# Altium PCB Switcher.PcbDoc (part 2 of 3)
Units mm, origin at the board's own origin, x right, y up, seen from the top; angles counter-clockwise.
Board outline 152.4 x 101.6 mm, 2 copper layers (Top Layer, Bottom Layer); 59 components, 74 nets, 310 pads, 234 vias.
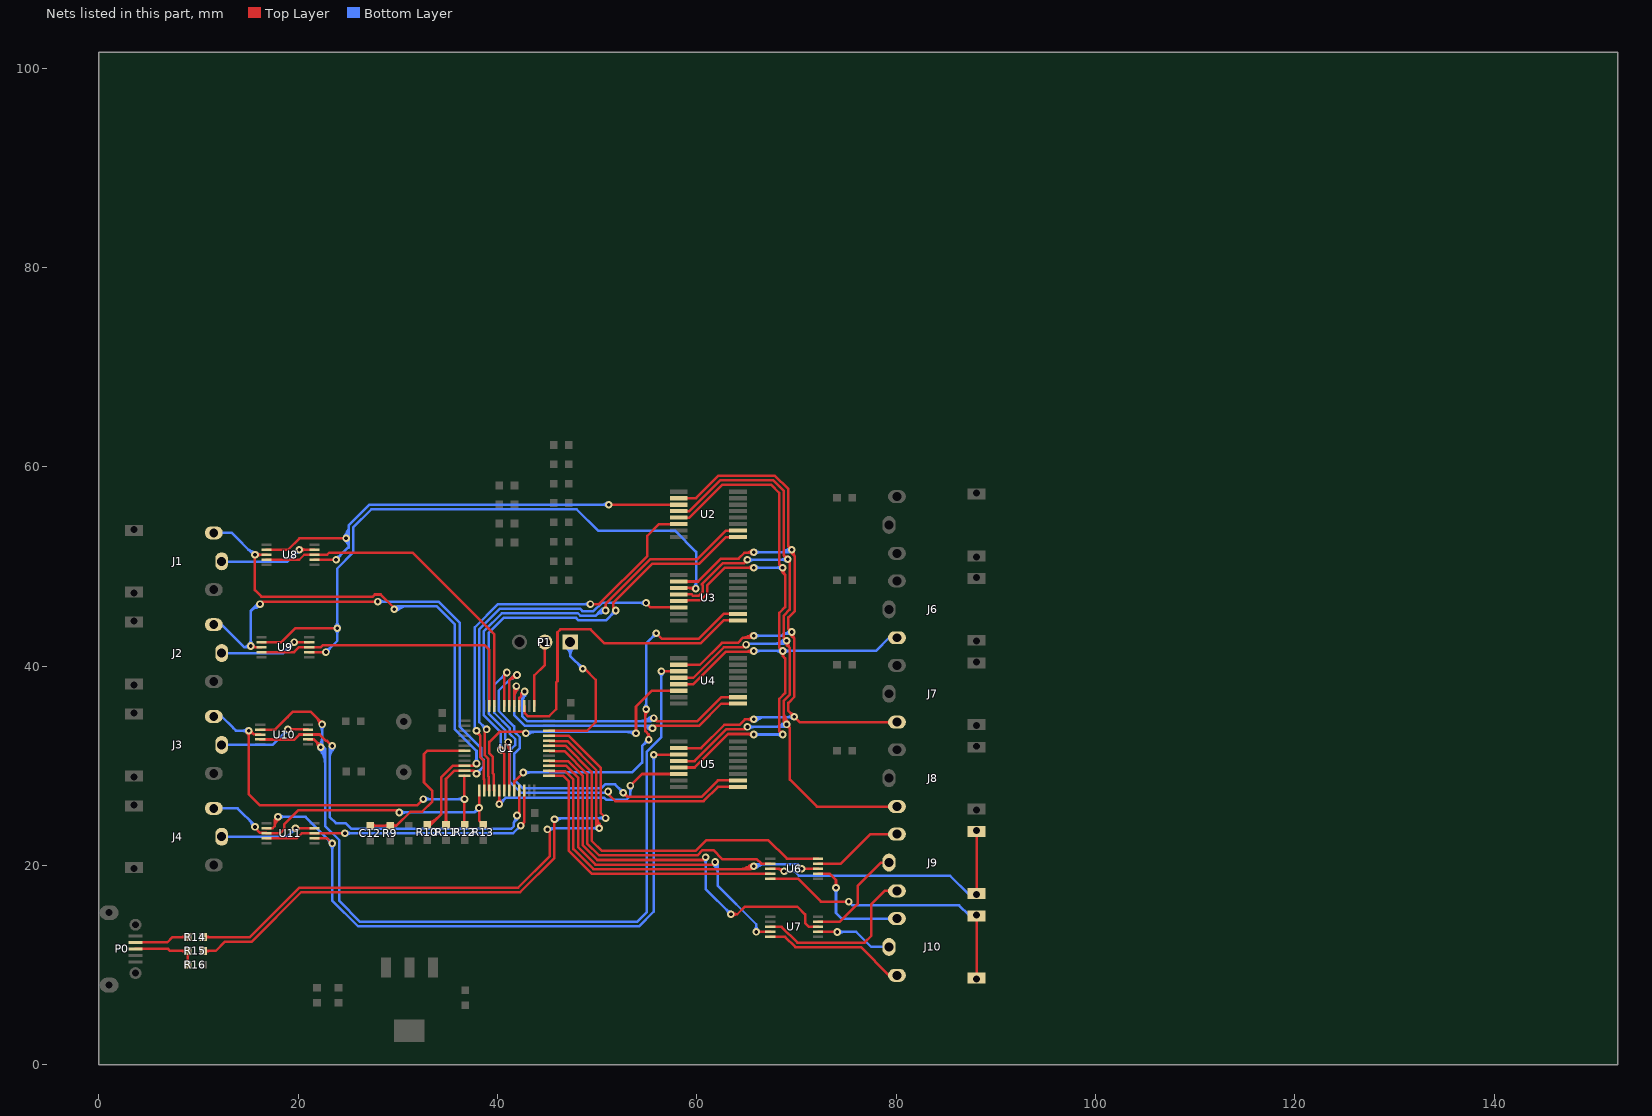
[diagram p2: the nets of this part, all layers, seen from the top]

## Via types
v1: diameter 0.762, hole 0.381, Top Layer to Bottom Layer, 152 vias
v2: diameter 0.76, hole 0.38, Top Layer to Bottom Layer, 80 vias
v3: diameter 0.72, hole 0.38, Top Layer to Bottom Layer, 2 vias

## Nets (pads, with @x,y where several pads share a name; then routed paths per layer and width w, separated by ;. In a path a pad name is that pad's centre, name@x,y a point inside that pad or via, vN(x,y) a via of type N, cw(c..) or ccw(c..) an arc to the next point about the centre after c; other vN are vias at no path point) (continued)
NetJ6_3: J6.3 U2.5 U3.5 U4.5 U5.5 | length 114.1
  Top Layer w0.254: U5.5@58.179,29.836 59.759,29.836 63.121,33.198 65.646,33.198 v1(65.697,33.147) ; U4.5@58.179,38.192 59.643,38.192 62.878,41.427 65.595,41.427 v1(65.697,41.529) ; U3.5@58.179,46.549 58.25,46.62 60.372,46.62 61.057,47.304 61.057,48.137 62.805,49.886 v1(65.701,49.886) ; U2.5@58.179,54.906 59.247,54.906 62.559,58.217 67.424,58.217 68.26,57.381 68.26,50.218 ; v1(68.618,33.147) 68.26,33.505 ; 65.087,49.886 cw(c65.087,49.272) 65.521,49.706 ccw(c65.087,49.272) 65.087,49.886 ; 65.087,49.886 ccw(c65.087,50.499) 65.521,50.065 cw(c65.087,50.499) 65.087,49.886 ; 68.26,33.505 cw(c67.994,33.238) 68.367,33.184 ccw(c67.994,33.238) 68.26,33.505 ; 68.26,33.505 ccw(c68.527,33.771) 68.581,33.398 cw(c68.527,33.771) 68.26,33.505 ; 68.26,33.505 68.26,36.726 68.846,37.312 68.846,40.783 68.618,41.011 ; 68.26,41.887 cw(c67.994,41.62) 68.367,41.566 ccw(c67.994,41.62) 68.26,41.887 ; 68.26,41.887 ccw(c68.527,42.153) 68.581,41.78 cw(c68.527,42.153) 68.26,41.887 ; 68.26,41.887 68.26,45.35 68.846,45.936 68.846,49.165 ; 68.26,41.887 v1(68.618,41.529) 68.618,41.011 ; 68.26,50.218 cw(c68.043,50) 68.344,49.938 ccw(c68.043,50) 68.26,50.218 ; 68.26,50.218 ccw(c68.478,50.435) 68.541,50.134 cw(c68.478,50.435) 68.26,50.218 ; 68.26,50.218 v1(68.593,49.886) ; 68.593,49.418 cw(c68.896,49.418) 68.731,49.673 ccw(c68.896,49.418) 68.593,49.418 ; 68.593,49.418 ccw(c68.289,49.418) 68.454,49.673 cw(c68.289,49.418) 68.593,49.418 ; 68.593,49.418 v1(68.593,49.886) ; 68.593,49.418 68.846,49.165 ; v1(68.593,49.886) ccw(c68.914,49.655) 68.634,49.376 cw(c68.914,49.655) v1(68.593,49.886) ; 68.618,41.011 cw(c69.02,41.011) 68.774,41.328 ccw(c69.02,41.011) 68.618,41.011 ; 68.618,41.011 ccw(c68.216,41.011) 68.462,41.328 cw(c68.216,41.011) 68.618,41.011 ; 68.846,49.165 cw(c69.16,49.479) 68.799,49.738 ccw(c69.16,49.479) 68.846,49.165 ; U3.5@58.917,46.49 cw(c59.23,46.177) 59.23,46.62 ccw(c59.23,46.177) U3.5@58.917,46.49 ; 64.839,41.427 ccw(c64.839,42.387) 65.517,41.709 cw(c64.839,42.387) 64.839,41.427 ; 64.961,33.198 cw(c64.961,32.411) 65.517,32.967 ccw(c64.961,32.411) 64.961,33.198 ; 65.206,33.198 ccw(c65.206,33.638) 65.517,33.327 cw(c65.206,33.638) 65.206,33.198 ; 65.329,41.427 cw(c65.329,41.161) 65.517,41.349 ccw(c65.329,41.161) 65.329,41.427
  Bottom Layer w0.254: v1(65.697,33.147) v1(68.618,33.147) ; v1(65.697,41.529) v1(68.618,41.529) 77.956,41.529 79.281,42.855 J6.3@80.069,42.855 ; v1(65.701,49.886) v1(68.593,49.886) ; 66.31,33.147 cw(c66.31,33.76) 65.877,33.327 ccw(c66.31,33.76) 66.31,33.147 ; 66.31,33.147 ccw(c66.31,32.534) 65.877,32.967 cw(c66.31,32.534) 66.31,33.147 ; 66.31,41.529 cw(c66.31,42.142) 65.877,41.709 ccw(c66.31,42.142) 66.31,41.529 ; 66.31,41.529 ccw(c66.31,40.916) 65.877,41.349 cw(c66.31,40.916) 66.31,41.529 ; 66.314,49.886 cw(c66.314,50.499) 65.88,50.065 ccw(c66.314,50.499) 66.314,49.886 ; 66.314,49.886 ccw(c66.314,49.272) 65.88,49.706 cw(c66.314,49.272) 66.314,49.886 ; 67.979,49.886 cw(c67.979,49.272) 68.413,49.706 ccw(c67.979,49.272) 67.979,49.886 ; 67.979,49.886 ccw(c67.979,50.499) 68.413,50.065 cw(c67.979,50.499) 67.979,49.886 ; 68.005,33.147 cw(c68.005,32.534) 68.438,32.967 ccw(c68.005,32.534) 68.005,33.147 ; 68.005,33.147 ccw(c68.005,33.76) 68.438,33.327 cw(c68.005,33.76) 68.005,33.147 ; 68.005,41.529 cw(c68.005,40.916) 68.438,41.349 ccw(c68.005,40.916) 68.005,41.529 ; 68.005,41.529 ccw(c68.005,42.142) 68.438,41.709 cw(c68.005,42.142) 68.005,41.529 ; 69.231,41.529 cw(c69.231,42.142) 68.798,41.709 ccw(c69.231,42.142) 69.231,41.529 ; 69.231,41.529 ccw(c69.231,40.916) 68.798,41.349 cw(c69.231,40.916) 69.231,41.529
NetJ7_3: J7.3 U2.2 U3.2 U4.2 U5.2 | length 118.7
  Top Layer w0.254: U5.2@58.179,31.786 60.416,31.786 62.742,34.112 64.249,34.112 64.808,34.671 v1(65.697,34.671) ; U4.2@58.179,40.142 60.3,40.142 62.499,42.341 64.107,42.341 64.64,42.875 65.519,42.875 v1(65.697,43.053) ; U3.2@58.179,48.499 60.126,48.499 62.426,50.8 64.183,50.8 64.767,51.384 65.646,51.384 v1(65.697,51.435) ; U2.2@58.179,56.856 59.905,56.856 62.18,59.131 67.803,59.131 69.174,57.759 69.174,52.022 ; 65.093,42.987 cw(c65.245,42.723) v1@65.492,42.903 ; 69.421,35.245 ccw(c69.85,35.36) v1(69.761,34.925) ; 69.441,35.265 cw(c69.326,34.836) v1(69.761,34.925) ; J7.3@79.281,34.386 70.3,34.386 v1(69.761,34.925) ; 65.084,34.671 cw(c65.084,34.058) 65.517,34.491 ccw(c65.084,34.058) 65.084,34.671 ; 65.084,34.671 ccw(c65.084,35.284) 65.517,34.851 cw(c65.084,35.284) 65.084,34.671 ; v1(65.697,43.053) cw(c65.267,43.483) 65.267,42.875 ccw(c65.267,43.483) v1(65.697,43.053) ; 69.174,43.767 cw(c68.956,43.548) 69.258,43.486 ccw(c68.956,43.548) 69.174,43.767 ; 69.174,43.767 ccw(c69.393,43.985) 69.455,43.683 cw(c69.393,43.985) 69.174,43.767 ; 69.174,43.767 69.174,44.896 69.83,45.551 69.83,51.019 ; 69.174,43.767 v1(69.507,43.434) ; 69.174,52.022 cw(c68.956,51.803) 69.258,51.741 ccw(c68.956,51.803) 69.174,52.022 ; 69.174,52.022 ccw(c69.393,52.24) 69.455,51.938 cw(c69.393,52.24) 69.174,52.022 ; 69.174,52.022 v1(69.507,51.689) ; 69.327,35.359 cw(c68.894,34.925) 69.507,34.925 ccw(c68.894,34.925) 69.327,35.359 ; 69.327,35.359 ccw(c69.761,35.792) 69.761,35.179 cw(c69.761,35.792) 69.327,35.359 ; 69.507,43.043 cw(c69.682,43.043) 69.611,43.202 ccw(c69.682,43.043) 69.507,43.043 ; 69.507,43.043 ccw(c69.332,43.043) 69.403,43.202 cw(c69.332,43.043) 69.507,43.043 ; 69.507,43.043 v1(69.507,43.434) ; 69.507,43.043 69.786,42.764 ; v1(69.507,43.434) ccw(c69.813,43.245) 69.559,42.991 cw(c69.813,43.245) v1(69.507,43.434) ; v1(69.507,51.689) ccw(c69.836,51.529) 69.577,51.271 cw(c69.836,51.529) v1(69.507,51.689) ; v1(69.507,51.689) 69.507,51.341 69.83,51.019 ; v1(69.761,34.925) 69.174,35.512 69.174,36.322 69.786,36.934 69.786,42.764 ; 69.786,42.764 cw(c70.094,43.072) 69.723,43.301 ccw(c70.094,43.072) 69.786,42.764 ; 69.83,51.019 cw(c70.176,51.365) 69.736,51.578 ccw(c70.176,51.365) 69.83,51.019 ; 64.654,42.875 ccw(c64.654,44.096) 65.517,43.233 cw(c64.654,44.096) 64.654,42.875 ; 64.961,51.384 ccw(c64.961,52.171) 65.517,51.615 cw(c64.961,52.171) 64.961,51.384 ; 65.207,51.384 cw(c65.207,50.945) 65.517,51.255 ccw(c65.207,50.945) 65.207,51.384
  Bottom Layer w0.254: v1(65.697,43.053) 68.501,43.053 68.704,43.256 ; v1(65.697,51.435) 69.253,51.435 v1(69.507,51.689) ; v1@65.89,34.836 ccw(c66.161,35.067) 66.34,34.759 ; 66.075,34.606 cw(c65.925,34.866) v1(65.697,34.671) ; 68.786,51.556 cw(c69.023,51.147) v1@69.338,51.5 ; 69.091,51.732 cw(c69.269,51.423) v1(69.507,51.689) ; v1@69.253,51.693 cw(c68.983,51.698) 69.118,51.465 cw(c69.253,51.231) v1@69.384,51.467 ; v1(69.507,43.434) 69.329,43.256 68.704,43.256 ; v1(69.761,34.925) 69.71,34.874 65.9,34.874 v1(65.697,34.671) ; v1(65.697,34.671) cw(c66.187,34.181) 66.187,34.874 ccw(c66.187,34.181) v1(65.697,34.671) ; 66.31,43.053 cw(c66.31,43.666) 65.877,43.233 ccw(c66.31,43.666) 66.31,43.053 ; 66.31,43.053 ccw(c66.31,42.44) 65.877,42.873 cw(c66.31,42.44) 66.31,43.053 ; 66.31,51.435 cw(c66.31,52.048) 65.877,51.615 ccw(c66.31,52.048) 66.31,51.435 ; 66.31,51.435 ccw(c66.31,50.822) 65.877,51.255 cw(c66.31,50.822) 66.31,51.435 ; 68.705,43.256 ccw(c68.705,43.963) 69.295,43.574 cw(c68.705,43.963) 68.705,43.256 ; v1(69.507,51.689) cw(c68.894,52.302) 68.894,51.435 ccw(c68.894,52.302) v1(69.507,51.689) ; v1@65.877,34.491 cw(c66.8,33.568) 66.8,34.874 ccw(c66.8,33.568) v1@65.877,34.491 ; 68.281,51.435 ccw(c68.281,52.915) 69.327,51.869 cw(c68.281,52.915) 68.281,51.435 ; 69.025,34.874 ccw(c69.025,35.661) 69.581,35.105 cw(c69.025,35.661) 69.025,34.874 ; 69.271,34.874 cw(c69.271,34.435) 69.581,34.745 ccw(c69.271,34.435) 69.271,34.874
NetJ8_3: J8.3 U2.4 U3.4 U4.4 U5.4 | length 125.9
  Top Layer w0.254: U5.4@58.179,30.486 59.762,30.486 62.931,33.655 64.808,33.655 v1(65.062,33.909) ; U4.4@58.179,38.842 59.646,38.842 62.688,41.884 64.655,41.884 ; U3.4@58.179,47.199 59.472,47.199 59.594,47.077 60.183,47.077 60.6,47.494 60.6,48.083 60.478,48.204 62.616,50.343 64.732,50.343 ; U2.4@58.179,55.556 59.251,55.556 62.37,58.674 67.613,58.674 68.717,57.57 68.717,51.126 ; v1(64.935,42.164) 64.655,41.884 ; v1(65.062,50.673) 64.732,50.343 ; 68.741,51.054 cw(c68.636,50.552) v1(69.119,50.724) ; v1@68.767,34.267 ccw(c68.438,34.414) 68.75,34.594 ccw(c69.062,34.774) v1@69.025,34.416 ; 68.789,51.102 ccw(c69.291,51.207) v1(69.119,50.724) ; v1@68.799,34.32 ccw(c68.372,34.654) 68.842,34.926 ; 69.03,34.6 cw(c68.691,34.404) v1(68.999,34.163) ; 69.283,33.833 cw(c69.382,34.206) v1(68.999,34.163) ; 69.303,49.59 69.303,45.671 68.717,45.085 68.717,42.827 ; 69.304,49.59 69.304,50.539 v1(69.119,50.724) ; J8.3@79.281,25.918 72.037,25.918 69.329,28.626 69.329,33.772 ; 64.655,41.884 cw(c64.783,41.757) 64.846,41.926 ccw(c64.783,41.757) 64.655,41.884 ; 64.655,41.884 ccw(c64.528,42.012) 64.697,42.075 cw(c64.528,42.012) 64.655,41.884 ; 64.732,50.343 cw(c64.946,50.129) 65.009,50.425 ccw(c64.946,50.129) 64.732,50.343 ; 64.732,50.343 ccw(c64.518,50.557) 64.814,50.62 cw(c64.518,50.557) 64.732,50.343 ; 68.717,34.445 cw(c68.586,34.314) 68.76,34.25 ccw(c68.586,34.314) 68.717,34.445 ; 68.717,34.445 ccw(c68.848,34.576) 68.912,34.402 cw(c68.848,34.576) 68.717,34.445 ; 68.717,34.445 68.717,36.537 69.329,37.149 69.329,41.824 ; 68.717,34.445 v1(68.999,34.163) ; 68.717,42.827 cw(c68.586,42.696) 68.76,42.632 ccw(c68.586,42.696) 68.717,42.827 ; 68.717,42.827 ccw(c68.848,42.958) 68.912,42.784 cw(c68.848,42.958) 68.717,42.827 ; 68.717,42.827 v1(68.999,42.545) ; 68.717,51.126 cw(c68.358,50.767) 68.865,50.738 ccw(c68.358,50.767) 68.717,51.126 ; 68.717,51.126 ccw(c69.076,51.485) 69.105,50.978 cw(c69.076,51.485) 68.717,51.126 ; 68.717,51.126 v1(69.119,50.724) ; v1(68.999,34.163) cw(c69.679,34.843) 68.717,34.843 ccw(c69.679,34.843) v1(68.999,34.163) ; v1(68.999,34.163) 68.999,34.102 69.329,33.772 ; 68.999,42.154 cw(c69.174,42.154) 69.103,42.313 ccw(c69.174,42.154) 68.999,42.154 ; 68.999,42.154 ccw(c68.824,42.154) 68.895,42.313 cw(c68.824,42.154) 68.999,42.154 ; 68.999,42.154 v1(68.999,42.545) ; 68.999,42.154 69.329,41.824 ; v1(68.999,42.545) ccw(c69.367,42.365) 69.077,42.075 cw(c69.367,42.365) v1(68.999,42.545) ; 69.329,33.772 cw(c69.564,34.006) 69.244,34.095 ccw(c69.564,34.006) 69.329,33.772 ; 69.329,41.824 cw(c69.705,42.2) 69.227,42.433 ccw(c69.705,42.2) 69.329,41.824 ; 68.717,35.456 ccw(c70.292,35.456) 69.179,34.343 cw(c70.292,35.456) 68.717,35.456 ; v1@68.999,33.909 cw(c68.999,33.444) 69.328,33.773 ccw(c68.999,33.444) v1@68.999,33.909
  Bottom Layer w0.254: v1(64.935,42.164) 65.011,42.24 68.694,42.24 v1(68.999,42.545) ; v1(65.062,33.909) 68.745,33.909 v1(68.999,34.163) ; v1(65.062,50.673) 69.068,50.673 v1(69.119,50.724) ; 68.2,42.367 cw(c68.503,41.843) v1@68.853,42.337 ; 68.278,34.03 cw(c68.515,33.621) v1@68.83,33.974 ; 68.544,42.566 cw(c68.755,42.2) v1(68.999,42.545) ; 68.583,34.206 cw(c68.761,33.897) v1(68.999,34.163) ; v1@68.745,34.167 cw(c68.475,34.172) 68.61,33.939 cw(c68.745,33.705) v1@68.876,33.941 ; v1@68.749,42.587 cw(c68.31,42.661) 68.532,42.275 cw(c68.755,41.89) v1@68.91,42.307 ; 65.675,33.909 cw(c65.675,34.522) 65.242,34.089 ccw(c65.675,34.522) 65.675,33.909 ; 65.675,33.909 ccw(c65.675,33.296) 65.242,33.729 cw(c65.675,33.296) 65.675,33.909 ; 65.675,50.673 cw(c65.675,51.286) 65.242,50.853 ccw(c65.675,51.286) 65.675,50.673 ; 65.675,50.673 ccw(c65.675,50.06) 65.242,50.493 cw(c65.675,50.06) 65.675,50.673 ; v1(68.999,34.163) cw(c68.386,34.776) 68.386,33.909 ccw(c68.386,34.776) v1(68.999,34.163) ; v1(68.999,42.545) cw(c68.263,43.281) 68.263,42.24 ccw(c68.263,43.281) v1(68.999,42.545) ; 67.649,42.24 ccw(c67.649,43.895) 68.819,42.725 cw(c67.649,43.895) 67.649,42.24 ; 67.773,33.909 ccw(c67.773,35.389) 68.819,34.343 cw(c67.773,35.389) 67.773,33.909 ; 68.383,50.673 ccw(c68.383,51.46) 68.939,50.904 cw(c68.383,51.46) 68.383,50.673 ; 68.629,50.673 cw(c68.629,50.234) 68.939,50.544 ccw(c68.629,50.234) 68.629,50.673
NetP0_2: P0.2 R14.1 | length 7.4
  Top Layer w0.254: P0.2@3.67,12.281 6.858,12.281 7.404,12.827 R14.1@8.928,12.827 ; 8.315,12.827 cw(c8.315,12.214) 8.748,12.647 ccw(c8.315,12.214) 8.315,12.827 ; 8.315,12.827 ccw(c8.315,13.44) 8.748,13.007 cw(c8.315,13.44) 8.315,12.827
NetP0_3: P0.3 R15.1 R16.1 | length 12.5
  Top Layer w0.254: P0.3@3.67,11.633 6.947,11.633 7.15,11.43 R15.1@8.928,11.43 R16.1@8.928,10.033 ; 8.315,11.43 cw(c8.315,10.817) R15.1@8.748,11.25 ; 8.315,11.43 ccw(c8.315,12.043) 8.748,11.61 cw(c8.315,12.043) 8.315,11.43 ; 8.315,11.43 cw(c8.315,10.817) R15.1@8.748,11.25 ; R15.1@8.748,11.25 cw(c8.315,10.817) 8.928,10.817 ; R15.1@8.748,11.25 cw(c8.315,10.817) 8.928,10.817 ; 8.928,10.646 cw(c8.315,10.646) 8.748,10.213 ccw(c8.315,10.646) 8.928,10.646 ; 8.928,10.646 ccw(c9.541,10.646) 9.108,10.213 cw(c9.541,10.646) 8.928,10.646 ; 8.928,10.817 cw(c9.541,10.817) 9.108,11.25 ccw(c9.541,10.817) 8.928,10.817
NetR14_2: R14.2 U1.32 | length 70.8
  Top Layer w0.254: R14.2@10.452,12.827 15.151,12.827 20.104,17.78 42.075,17.78 45.25,20.955 45.25,23.368 v1(44.996,23.622) ; U1.32@45.177,32.525 45.22,32.482 46.998,32.482 49.898,29.583 49.898,24.054 ; v1@49.965,23.838 ccw(c49.548,23.993) 49.933,24.216 ccw(c50.319,24.438) v1@50.245,23.999 ; v1@49.995,23.895 ccw(c49.501,24.245) 50.025,24.548 ; 50.224,24.204 cw(c49.858,23.993) v1(50.203,23.749) ; 11.065,12.827 cw(c11.065,13.44) 10.632,13.007 ccw(c11.065,13.44) 11.065,12.827 ; 11.065,12.827 ccw(c11.065,12.214) 10.632,12.647 cw(c11.065,12.214) 11.065,12.827 ; 49.898,24.054 cw(c49.729,23.885) 49.959,23.819 ccw(c49.729,23.885) 49.898,24.054 ; 49.898,24.054 ccw(c50.067,24.223) 50.133,23.993 cw(c50.067,24.223) 49.898,24.054 ; 49.898,24.054 v1(50.203,23.749) ; v1(50.203,23.749) cw(c50.939,24.485) 49.898,24.485 ccw(c50.939,24.485) v1(50.203,23.749) ; 49.898,25.099 ccw(c51.553,25.099) 50.383,23.929 cw(c51.553,25.099) 49.898,25.099
  Bottom Layer w0.254: v1(44.996,23.622) 45.123,23.749 v1(50.203,23.749) ; 49.59,23.749 cw(c49.59,23.136) 50.023,23.569 ccw(c49.59,23.136) 49.59,23.749 ; 49.59,23.749 ccw(c49.59,24.362) 50.023,23.929 cw(c49.59,24.362) 49.59,23.749 ; v1@45.176,23.442 cw(c45.916,22.702) 45.916,23.749 ccw(c45.916,22.702) v1@45.176,23.442
NetR15_2: R15.2 U1.33 | length 65.4
  Top Layer w0.254: R15.2@10.452,11.43 11.722,11.43 12.662,12.37 15.34,12.37 20.293,17.323 42.264,17.323 45.707,20.766 v1(45.707,24.638) ; U1.33@45.177,33.025 47.102,33.025 50.355,29.772 50.355,25.248 v1(50.838,24.765) ; 11.065,11.43 cw(c11.065,12.043) 10.632,11.61 ccw(c11.065,12.043) 11.065,11.43 ; 11.065,11.43 ccw(c11.065,10.817) 10.632,11.25 cw(c11.065,10.817) 11.065,11.43
  Bottom Layer w0.254: v1(45.707,24.638) 45.834,24.765 v1(50.838,24.765) ; 50.225,24.765 cw(c50.225,24.152) 50.658,24.585 ccw(c50.225,24.152) 50.225,24.765 ; 50.225,24.765 ccw(c50.225,25.378) 50.658,24.945 cw(c50.225,25.378) 50.225,24.765 ; v1@45.887,24.458 cw(c46.627,23.718) 46.627,24.765 ccw(c46.627,23.718) v1@45.887,24.458
NRST: C12.2 R9.1 U1.7 | length 22.3
  Top Layer w0.254: C12.2@27.216,24.003 R9.1@29.248,24.003 29.855,24.003 ; U1.7@36.677,31.525 32.96,31.525 32.616,31.181 32.616,28.331 33.453,27.494 33.453,26.43 32.423,25.4 31.252,25.4 29.855,24.003 ; 27.829,24.003 cw(c27.829,24.616) 27.396,24.183 ccw(c27.829,24.616) 27.829,24.003 ; 27.829,24.003 ccw(c27.829,23.39) 27.396,23.823 cw(c27.829,23.39) 27.829,24.003 ; 28.635,24.003 cw(c28.635,23.39) 29.068,23.823 ccw(c28.635,23.39) 28.635,24.003 ; 28.635,24.003 ccw(c28.635,24.616) 29.068,24.183 cw(c28.635,24.616) 28.635,24.003 ; 29.855,24.003 cw(c29.855,24.601) 29.429,24.181 ccw(c29.855,24.601) 29.855,24.003 ; 29.855,24.003 ccw(c29.855,23.405) 29.429,23.825 cw(c29.855,23.405) 29.855,24.003
RX1: U1.31 U6.10 | length 36.6
  Top Layer w0.254: U1.31@45.177,32.025 46.809,32.025 49.441,29.393 49.441,22.486 50.457,21.47 59.861,21.47 60.946,22.555 67.145,22.555 69.015,20.685 U6.10@72.161,20.685
SWCLK: P1.2 U1.37 | length 6.8
  Top Layer w0.254: U1.37@43.677,36.025 43.677,39.067 44.742,40.132 P1.2@44.742,42.418
SWDIO: P1.1 U1.34 | length 21.8
  Top Layer w0.254: U1.34@45.177,33.525 48.981,33.525 49.847,34.392 49.847,38.633 48.73,39.751 v1(48.552,39.751)
  Bottom Layer w0.254: P1.1@47.282,42.418 47.282,41.021 ; v1@48.298,39.751 ccw(c47.685,39.751) 48.118,40.185 ccw(c48.552,40.618) v1@48.552,40.005 ; v1(48.552,39.751) 47.282,41.021 ; 47.282,41.021 cw(c48.501,41.021) 47.7,41.94 ccw(c48.501,41.021) 47.282,41.021 ; 47.282,41.021 ccw(c46.063,41.021) 46.864,41.94 cw(c46.063,41.021) 47.282,41.021 ; 47.282,41.58 cw(c48.013,41.58) 47.533,42.131 ccw(c48.013,41.58) 47.282,41.58 ; 47.282,41.58 ccw(c46.551,41.58) 47.031,42.131 cw(c46.551,41.58) 47.282,41.58
TX1: U1.30 U6.2 | length 31.4
  Top Layer w0.254: U1.30@45.177,31.525 45.222,31.48 46.708,31.48 48.983,29.205 48.983,22.231 50.201,21.013 60.05,21.013 60.576,21.539 61.645,21.539 62.534,20.65 65.992,20.65 66.456,20.185 U6.2@67.361,20.185
U2A: U1.18 U2.10 | length 59.5
  Top Layer w0.254: v1(40.297,31.623) 40.677,31.243 ; U1.18@40.677,27.526 40.677,31.243 ; v1(50.838,45.593) 50.838,46.239 55.348,50.749 60.047,50.749 62.903,53.606 U2.10@64.119,53.606 ; 40.677,31.243 cw(c40.989,31.555) 40.55,31.598 ccw(c40.989,31.555) 40.677,31.243 ; 40.677,31.243 ccw(c40.365,30.931) 40.322,31.37 cw(c40.365,30.931) 40.677,31.243 ; 50.838,46.206 cw(c50.225,46.206) 50.658,45.773 ccw(c50.225,46.206) 50.838,46.206 ; 50.838,46.206 ccw(c51.451,46.206) 51.018,45.773 cw(c51.451,46.206) 50.838,46.206
  Bottom Layer w0.254: v1(40.297,31.623) 40.297,33.401 38.634,35.064 38.634,43.526 40.422,45.314 48.058,45.314 48.312,45.06 49.808,45.06 ; 50.257,45.321 ccw(c50.22,46.158) v1(50.838,45.593) ; v1@50.602,45.687 cw(c50.436,45.754) 50.445,45.575 cw(c50.453,45.397) v1@50.612,45.478 ; 40.297,32.236 cw(c39.684,32.236) 40.117,31.803 ccw(c39.684,32.236) 40.297,32.236 ; 40.297,32.236 ccw(c40.91,32.236) 40.477,31.803 cw(c40.91,32.236) 40.297,32.236 ; 49.808,45.06 cw(c50.556,44.312) 50.783,45.345 ccw(c50.556,44.312) 49.808,45.06 ; 49.808,45.06 50.341,45.593 ; 50.341,45.593 cw(c50.341,45.234) 50.632,45.444 ccw(c50.341,45.234) 50.341,45.593 ; 50.341,45.593 ccw(c50.341,45.952) 50.632,45.742 cw(c50.341,45.952) 50.341,45.593 ; 50.341,45.593 v1(50.838,45.593) ; v1(50.838,45.593) ccw(c50.674,44.85) 50.136,45.388 cw(c50.674,44.85) v1(50.838,45.593) ; 50.464,45.716 cw(c50.793,45.387) 50.893,45.841 ccw(c50.793,45.387) 50.464,45.716
U2B: U1.19 U2.9 | length 50.2
  Top Layer w0.254: v1(41.059,32.385) 41.177,32.267 U1.19@41.177,27.525 ; v1(51.854,45.593) 51.6,45.847 51.6,46.355 55.537,50.292 60.236,50.292 62.9,52.956 U2.9@64.119,52.956 ; v1@40.879,32.205 cw(c40.162,31.488) 41.177,31.488 ccw(c40.162,31.488) v1@40.879,32.205
  Bottom Layer w0.254: v1(41.059,32.385) 40.754,32.69 40.754,33.59 39.091,35.254 39.091,43.337 40.611,44.857 47.868,44.857 48.122,44.603 50.864,44.603 v1(51.854,45.593) ; 51.42,45.159 cw(c51.854,44.726) 51.854,45.339 ccw(c51.854,44.726) 51.42,45.159 ; 51.42,45.159 ccw(c50.987,45.593) 51.6,45.593 cw(c50.987,45.593) 51.42,45.159
U2EN: U1.14 U2.6 | length 46.1
  Top Layer w0.254: v1(37.884,33.528) 37.884,33.401 38.265,33.02 ; U1.14@38.677,27.525 38.677,28.616 38.595,28.698 38.595,30.521 38.265,30.851 38.265,33.02 ; v1(49.314,46.228) 50.18,46.228 55.029,51.077 55.029,53.086 56.199,54.256 U2.6@58.179,54.256 ; 38.265,33.02 cw(c38.613,33.368) 38.132,33.474 ccw(c38.613,33.368) 38.265,33.02 ; v1@37.884,33.274 cw(c37.884,32.967) 38.101,33.184 ccw(c37.884,32.967) v1@37.884,33.274
  Bottom Layer w0.254: v1(37.884,33.528) 37.72,33.692 37.72,43.905 40.043,46.228 v1(49.314,46.228) ; 48.701,46.228 cw(c48.701,45.615) 49.134,46.048 ccw(c48.701,45.615) 48.701,46.228 ; 48.701,46.228 ccw(c48.701,46.841) 49.134,46.408 cw(c48.701,46.841) 48.701,46.228
U2MIC: U2.3 U8.2 U8.7 | length 60.8
  Top Layer w0.254: U8.2@16.815,51.681 18.953,51.681 20.104,52.832 v1(24.803,52.832) ; U8.7@21.615,50.681 v1(23.795,50.681) ; v1(51.147,56.206) U2.3@58.179,56.206
  Bottom Layer w0.254: v1(23.795,50.681) 25.057,51.943 v1@25.057,52.832 ; 24.76,53.248 ccw(c25.069,53.07) v1(24.803,52.832) ; v1@24.799,53.086 ccw(c24.794,53.356) 25.027,53.221 ccw(c25.261,53.086) v1@25.025,52.955 ; 24.936,53.553 ccw(c25.345,53.316) v1@24.992,53.001 ; v1(51.147,56.206) 27.161,56.206 25.057,54.102 v1@25.057,52.832 ; 24.229,51.115 cw(c23.795,51.548) 23.795,50.935 ccw(c23.795,51.548) 24.229,51.115 ; 24.229,51.115 ccw(c24.662,50.681) 24.049,50.681 cw(c24.662,50.681) 24.229,51.115 ; v1(24.803,52.832) ccw(c24.19,53.445) 25.057,53.445 cw(c24.19,53.445) v1(24.803,52.832) ; v1(24.803,52.832) cw(c24.509,52.37) 25.057,52.37 ccw(c24.509,52.37) v1(24.803,52.832) ; v1(24.803,52.832) v1@25.057,52.832 ; 50.534,56.206 cw(c50.534,55.592) 50.968,56.026 ccw(c50.534,55.592) 50.534,56.206 ; 50.534,56.206 ccw(c50.534,56.819) 50.968,56.385 cw(c50.534,56.819) 50.534,56.206 ; v1@24.623,53.012 ccw(c23.577,54.058) 25.057,54.058 cw(c23.577,54.058) v1@24.623,53.012 ; v1@24.667,52.618 cw(c24.216,51.907) 25.057,51.907 ccw(c24.216,51.907) v1@24.667,52.618
U3A: U1.20 U3.10 | length 49.8
  Top Layer w0.254: U1.20@41.677,27.525 41.677,28.431 v1(42.583,29.337) ; v1(54.902,35.687) 54.902,35.372 54.826,35.296 54.826,33.487 55.156,33.157 ; v1(55.156,32.639) 55.156,33.157 ; v1(55.918,43.307) 56.477,42.748 60.174,42.748 62.675,45.249 U3.10@64.119,45.249 ; 54.826,35.288 cw(c54.978,35.288) 54.95,35.437 ccw(c54.978,35.288) 54.826,35.288 ; 54.826,35.288 ccw(c54.544,35.288) 54.732,35.498 cw(c54.544,35.288) 54.826,35.288 ; 55.156,33.157 cw(c54.754,33.157) 55,32.84 ccw(c54.754,33.157) 55.156,33.157 ; 55.156,33.157 ccw(c55.558,33.157) 55.312,32.84 cw(c55.558,33.157) 55.156,33.157 ; v1@54.722,35.507 cw(c54.472,35.257) 54.826,35.257 ccw(c54.472,35.257) v1@54.722,35.507 ; 54.826,34.89 cw(c55.699,34.89) 55.082,35.507 ccw(c55.699,34.89) 54.826,34.89
  Bottom Layer w0.254: v1(42.583,29.337) 53.505,29.337 54.496,30.328 54.496,31.979 v1(55.156,32.639) ; v1(54.902,35.687) 54.902,42.291 v1(55.918,43.307) ; 43.196,29.337 cw(c43.196,29.95) 42.763,29.517 ccw(c43.196,29.95) 43.196,29.337 ; 43.196,29.337 ccw(c43.196,28.724) 42.763,29.157 cw(c43.196,28.724) 43.196,29.337 ; 54.722,32.205 cw(c55.156,31.772) 55.156,32.385 ccw(c55.156,31.772) 54.722,32.205 ; 54.722,32.205 ccw(c54.289,32.639) 54.902,32.639 cw(c54.289,32.639) 54.722,32.205 ; 54.902,36.3 cw(c54.289,36.3) 54.722,35.867 ccw(c54.289,36.3) 54.902,36.3 ; 54.902,36.3 ccw(c55.515,36.3) 55.082,35.867 cw(c55.515,36.3) 54.902,36.3 ; 55.484,42.873 cw(c55.918,42.44) 55.918,43.053 ccw(c55.918,42.44) 55.484,42.873 ; 55.484,42.873 ccw(c55.051,43.307) 55.664,43.307 cw(c55.051,43.307) 55.484,42.873
U3B: U1.39 U3.9 | length 31.9
  Top Layer w0.254: U1.39@42.677,36.025 42.722,35.98 42.722,35.289 43.009,35.001 43.798,35.001 43.817,34.982 45.18,34.982 45.885,35.687 45.885,38.379 46.012,38.506 46.012,43.409 46.291,43.688 49.339,43.688 50.736,42.291 60.363,42.291 62.671,44.599 U3.9@64.119,44.599
U3EN: U1.15 U3.6 | length 42.1
  Top Layer w0.254: v1(38.9,33.655) 38.722,33.477 38.722,31.065 39.052,30.735 39.052,28.969 39.134,28.887 39.134,27.568 U1.15@39.177,27.525 ; v1(54.902,46.355) 55.358,45.899 U3.6@58.179,45.899
  Bottom Layer w0.254: v1(38.9,33.655) 38.177,34.378 38.177,43.715 40.232,45.771 48.247,45.771 48.501,45.517 49.619,45.517 50.457,46.355 v1(54.902,46.355) ; 38.466,34.089 cw(c38.033,33.655) 38.646,33.655 ccw(c38.033,33.655) 38.466,34.089 ; 38.466,34.089 ccw(c38.9,34.522) 38.9,33.909 cw(c38.9,34.522) 38.466,34.089 ; 54.289,46.355 cw(c54.289,45.742) 54.722,46.175 ccw(c54.289,45.742) 54.289,46.355 ; 54.289,46.355 ccw(c54.289,46.968) 54.722,46.535 cw(c54.289,46.968) 54.289,46.355
U3MIC: U3.3 U9.2 U9.7 | length 75.6
  Top Layer w0.254: U9.2@16.307,42.41 18.318,42.41 19.723,43.815 v1(23.914,43.815) ; U9.7@21.107,41.41 v1(22.779,41.41) ; U3.3@58.179,47.849 59.828,47.849 v1(59.889,47.788) ; 59.128,47.849 cw(c59.128,47.028) 59.709,47.608 ccw(c59.128,47.028) 59.128,47.849 ; 59.423,47.849 ccw(c59.423,48.254) 59.709,47.968 cw(c59.423,48.254) 59.423,47.849
  Bottom Layer w0.254: v1(22.779,41.41) 23.914,42.545 v1(23.914,43.815) 23.914,49.794 25.514,51.394 25.514,53.913 27.35,55.749 47.921,55.749 50.076,53.594 57.8,53.594 59.925,51.47 59.925,47.752 v1(59.889,47.788) ; 23.213,41.844 cw(c22.779,42.277) 22.779,41.664 ccw(c22.779,42.277) 23.213,41.844 ; 23.213,41.844 ccw(c23.646,41.41) 23.033,41.41 cw(c23.646,41.41) 23.213,41.844 ; 23.914,43.202 cw(c24.527,43.202) 24.094,43.635 ccw(c24.527,43.202) 23.914,43.202 ; 23.914,43.202 ccw(c23.301,43.202) 23.734,43.635 cw(c23.301,43.202) 23.914,43.202 ; 23.914,44.428 cw(c23.301,44.428) 23.734,43.995 ccw(c23.301,44.428) 23.914,44.428 ; 23.914,44.428 ccw(c24.527,44.428) 24.094,43.995 cw(c24.527,44.428) 23.914,44.428 ; v1@59.709,47.968 ccw(c59.188,48.488) 59.925,48.488 cw(c59.188,48.488) v1@59.709,47.968 ; 59.925,48.314 ccw(c60.415,48.314) 60.068,47.968 cw(c60.415,48.314) 59.925,48.314
U4A: U1.40 U4.10 | length 39.9
  Top Layer w0.254: U1.40@42.177,36.025 42.177,36.815 42.388,37.026 42.388,37.27 42.583,37.465 v1(42.71,37.465) ; v1(55.664,34.798) 55.969,34.493 ; U4.10@64.119,36.892 62.446,36.892 60.047,34.493 55.969,34.493 ; 55.969,34.493 cw(c56.138,34.662) 55.908,34.728 ccw(c56.138,34.662) 55.969,34.493 ; 55.969,34.493 ccw(c55.8,34.324) 55.734,34.554 cw(c55.8,34.324) 55.969,34.493
  Bottom Layer w0.254: v1@42.488,37.342 cw(c42.252,37.211) 42.486,37.076 cw(c42.719,36.941) v1@42.714,37.211 ; v1@42.521,37.296 cw(c42.168,36.981) 42.577,36.744 ; 42.753,37.049 ccw(c42.444,37.227) v1(42.71,37.465) ; 54.865,34.62 cw(c55.168,34.096) v1@55.518,34.59 ; 55.209,34.819 cw(c55.42,34.453) v1(55.664,34.798) ; v1@55.414,34.84 cw(c54.975,34.914) 55.197,34.528 cw(c55.42,34.143) v1@55.575,34.56 ; v1(42.71,37.465) ccw(c43.323,36.852) 42.456,36.852 cw(c43.323,36.852) v1(42.71,37.465) ; v1(42.71,37.465) 42.456,37.211 42.456,35.001 42.964,34.493 55.359,34.493 v1(55.664,34.798) ; v1(55.664,34.798) cw(c54.928,35.534) 54.928,34.493 ccw(c54.928,35.534) v1(55.664,34.798) ; 42.456,36.239 cw(c43.936,36.239) 42.89,37.285 ccw(c43.936,36.239) 42.456,36.239 ; 54.314,34.493 ccw(c54.314,36.148) 55.484,34.978 cw(c54.314,36.148) 54.314,34.493
U4B: U1.41 U4.9 | length 42.7
  Top Layer w0.254: U1.41@41.677,36.025 41.677,37.702 41.888,37.913 v1(41.888,38.007) ; v1@41.718,37.818 cw(c41.469,37.539) 41.793,37.353 ; 41.949,37.623 ccw(c41.682,37.777) v1(41.888,38.007) ; v1(55.537,33.782) 55.791,34.036 60.236,34.036 62.442,36.242 U4.9@64.119,36.242 ; v1(41.888,38.007) ccw(c42.397,37.498) 41.677,37.498 cw(c42.397,37.498) v1(41.888,38.007) ; 41.677,36.885 cw(c43.01,36.885) 42.067,37.828 ccw(c43.01,36.885) 41.677,36.885
  Bottom Layer w0.254: v1@41.718,37.818 cw(c41.469,37.539) 41.793,37.353 ; 41.949,37.623 ccw(c41.682,37.777) v1(41.888,38.007) ; 54.816,33.915 ccw(c55.053,34.324) v1@55.368,33.971 ; 55.121,33.739 ccw(c55.299,34.048) v1(55.537,33.782) ; v1@55.283,33.778 ccw(c55.013,33.773) 55.148,34.006 ccw(c55.283,34.24) v1@55.414,34.004 ; v1(41.888,38.007) ccw(c42.397,37.498) 41.677,37.498 cw(c42.397,37.498) v1(41.888,38.007) ; v1(41.888,38.007) 41.677,37.796 41.677,35.069 42.71,34.036 55.283,34.036 v1(55.537,33.782) ; v1(55.537,33.782) ccw(c54.924,33.169) 54.924,34.036 cw(c54.924,33.169) v1(55.537,33.782) ; 41.677,36.885 cw(c43.01,36.885) 42.067,37.828 ccw(c43.01,36.885) 41.677,36.885 ; 54.311,34.036 cw(c54.311,32.556) 55.357,33.602 ccw(c54.311,32.556) 54.311,34.036
U4EN: U1.16 U4.6 | length 31.3
  Top Layer w0.254: U1.16@39.677,27.525 39.634,27.568 39.634,29.158 39.509,29.283 39.509,30.924 39.179,31.254 39.179,32.41 40.17,33.401 42.71,33.401 v1(42.837,33.274) ; v1(53.886,33.274) 53.886,35.941 55.487,37.542 U4.6@58.179,37.542
  Bottom Layer w0.254: v1(42.837,33.274) 42.964,33.401 53.759,33.401 v1(53.886,33.274) ; v1@43.017,33.094 cw(c43.757,32.354) 43.757,33.401 ccw(c43.757,32.354) v1@43.017,33.094 ; 52.966,33.401 cw(c52.966,32.354) 53.706,33.094 ccw(c52.966,32.354) 52.966,33.401
U4MIC: U4.3 U10.2 U10.7 | length 104.9
  Top Layer w0.254: U10.2@16.18,33.647 17.683,33.647 18.936,34.9 18.936,34.915 19.429,35.408 21.272,35.408 22.39,34.29 v1(22.39,34.163) cw(c22.593,34.709) 22.03,34.558 ; U10.7@20.98,32.647 21.582,32.647 22.263,31.966 v1(22.263,31.877) cw(c22.429,32.389) 21.909,32.25 ; v1(56.431,39.492) U4.3@58.179,39.492 ; 21.767,32.462 cw(c21.182,31.877) 22.009,31.877 ccw(c21.182,31.877) 21.767,32.462 ; 21.867,34.813 cw(c21.216,34.163) 22.136,34.163 ccw(c21.216,34.163) 21.867,34.813 ; 21.981,32.248 ccw(c22.263,32.53) 22.263,32.131 cw(c22.263,32.53) 21.981,32.248 ; 22.173,34.507 ccw(c22.39,34.724) 22.39,34.417 cw(c22.39,34.724) 22.173,34.507
  Bottom Layer w0.254: v1@22.197,31.632 cw(c22.039,31.039) 22.57,31.346 cw(c23.101,31.653) v1@22.508,31.811 ; v1(22.39,34.163) 22.39,32.004 v1(22.263,31.877) ; v1(56.431,39.492) 56.431,32.887 54.953,31.41 54.953,15.304 54,14.351 26.211,14.351 24.117,16.445 24.117,22.54 22.695,23.962 22.695,31.699 22.517,31.877 v1(22.263,31.877) ; v1(22.263,31.877) cw(c21.22,30.834) 22.695,30.834 ccw(c21.22,30.834) v1(22.263,31.877) ; 22.39,33.55 cw(c23.003,33.55) 22.57,33.983 ccw(c23.003,33.55) 22.39,33.55 ; 22.39,33.55 ccw(c21.777,33.55) 22.21,33.983 cw(c21.777,33.55) 22.39,33.55 ; 56.431,38.879 cw(c57.044,38.879) 56.61,39.313 ccw(c57.044,38.879) 56.431,38.879 ; 56.431,38.879 ccw(c55.817,38.879) 56.251,39.313 cw(c55.817,38.879) 56.431,38.879 ; v1@22.083,31.697 cw(c20.607,30.221) 22.695,30.221 ccw(c20.607,30.221) v1@22.083,31.697 ; v1@22.083,32.057 ccw(c21.343,32.797) 22.39,32.797 cw(c21.343,32.797) v1@22.083,32.057 ; v1@22.443,32.057 cw(c21.833,31.447) 22.695,31.447 ccw(c21.833,31.447) v1@22.443,32.057
U5A: U1.42 U5.10 | length 50.3
  Top Layer w0.254: U1.42@41.177,36.025 41.177,38.599 ; 41.402,38.78 ccw(c41.269,39.607) v1(41.948,39.116) ; v1(52.616,27.305) 52.997,26.924 ; U5.10@64.119,28.536 62.102,28.536 60.49,26.924 52.997,26.924 ; 41.177,38.599 cw(c41.827,37.948) 41.922,38.863 ccw(c41.827,37.948) 41.177,38.599 ; 41.177,38.599 41.694,39.116 v1(41.948,39.116) ; v1(41.948,39.116) ccw(c41.898,38.632) 41.554,38.976 cw(c41.898,38.632) v1(41.948,39.116) ; 52.997,26.924 cw(c53.311,27.238) 52.869,27.281 ccw(c53.311,27.238) 52.997,26.924 ; 52.997,26.924 ccw(c52.683,26.61) 52.64,27.052 cw(c52.683,26.61) 52.997,26.924
  Bottom Layer w0.254: 41.477,38.736 ccw(c41.284,39.456) v1(41.948,39.116) ; v1(52.616,27.305) 51.778,28.143 50.797,28.143 50.416,27.762 42.518,27.762 41.694,28.586 41.694,31.242 42.227,31.775 42.227,32.869 41.668,33.428 41.668,33.969 40.119,35.518 40.119,37.541 41.694,39.116 v1(41.948,39.116) ; v1(41.948,39.116) ccw(c41.948,38.503) 41.514,38.936 cw(c41.948,38.503) v1(41.948,39.116) ; 52.182,27.739 cw(c51.749,27.305) 52.362,27.305 ccw(c51.749,27.305) 52.182,27.739 ; 52.182,27.739 ccw(c52.616,28.172) 52.616,27.559 cw(c52.616,28.172) 52.182,27.739 ; 41.081,38.503 cw(c41.948,37.636) 41.948,38.862 ccw(c41.948,37.636) 41.081,38.503
U5B: U1.43 U5.9 | length 42.7
  Top Layer w0.254: U1.43@40.677,36.025 40.677,39.369 40.678,39.37 v1(40.932,39.37) ; v1(51.092,27.432) 51.092,27.178 51.803,26.467 60.679,26.467 62.098,27.886 U5.9@64.119,27.886
  Bottom Layer w0.254: v1(40.932,39.37) 39.662,38.1 39.662,35.329 41.211,33.78 41.211,33.239 41.77,32.68 41.77,32.09 41.354,31.674 41.237,31.674 41.237,28.397 42.329,27.305 50.965,27.305 v1(51.092,27.432) ; 40.498,38.936 cw(c40.932,38.503) 40.932,39.116 ccw(c40.932,38.503) 40.498,38.936 ; 40.498,38.936 ccw(c40.065,39.37) 40.678,39.37 cw(c40.065,39.37) 40.498,38.936
U5EN: U1.17 U5.6 | length 27.2
  Top Layer w0.254: v1(40.17,26.162) 40.177,26.169 U1.17@40.177,27.525 ; v1(53.327,28.016) 54.497,29.186 U5.6@58.179,29.186 ; v1@39.99,26.342 ccw(c39.541,26.791) 40.177,26.791 cw(c39.541,26.791) v1@39.99,26.342 ; 40.177,26.759 ccw(c40.767,26.759) 40.35,26.342 cw(c40.767,26.759) 40.177,26.759
  Bottom Layer w0.254: v1(40.17,26.162) 40.805,26.797 50.711,26.797 50.914,26.594 52.911,26.594 53.327,27.01 v1(53.327,28.016) ; 40.604,26.596 cw(c40.17,27.029) 40.17,26.416 ccw(c40.17,27.029) 40.604,26.596 ; 40.604,26.596 ccw(c41.037,26.162) 40.424,26.162 cw(c41.037,26.162) 40.604,26.596 ; 53.327,27.403 cw(c53.94,27.403) 53.507,27.836 ccw(c53.94,27.403) 53.327,27.403 ; 53.327,27.403 ccw(c52.714,27.403) 53.147,27.836 cw(c52.714,27.403) 53.327,27.403
U5MIC: U5.3 U11.2 U11.7 | length 80.7
  Top Layer w0.254: U11.2@16.815,23.741 17.417,23.741 17.655,23.979 17.655,24.581 ; 17.77,24.358 ccw(c17.589,24.544) v1@17.779,24.72 ; U11.7@21.615,22.741 22.89,22.741 v1(23.406,22.225) ; v1(55.664,31.115) 55.685,31.136 U5.3@58.179,31.136 ; 17.655,24.581 cw(c17.834,24.402) 17.9,24.647 ccw(c17.834,24.402) 17.655,24.581 ; 17.655,24.581 ccw(c17.476,24.76) 17.721,24.826 cw(c17.476,24.76) 17.655,24.581 ; 17.655,24.581 v1(17.966,24.892) ; v1(17.966,24.892) ccw(c18.263,24.361) 17.655,24.361 cw(c18.263,24.361) v1(17.966,24.892) ; 17.655,23.928 cw(c18.506,23.928) 18.09,24.67 ccw(c18.506,23.928) 17.655,23.928
  Bottom Layer w0.254: v1(17.966,24.892) 20.739,24.892 v1(23.406,22.225) 23.406,16.51 26.022,13.894 54.189,13.894 55.664,15.369 v1(55.664,31.115) ; 18.579,24.892 cw(c18.579,25.505) 18.146,25.072 ccw(c18.579,25.505) 18.579,24.892 ; 18.579,24.892 ccw(c18.579,24.279) 18.146,24.712 cw(c18.579,24.279) 18.579,24.892 ; 22.972,22.659 cw(c22.539,22.225) 23.152,22.225 ccw(c22.539,22.225) 22.972,22.659 ; 22.972,22.659 ccw(c23.406,23.092) 23.406,22.479 cw(c23.406,23.092) 22.972,22.659 ; 23.406,21.612 cw(c24.019,21.612) 23.586,22.045 ccw(c24.019,21.612) 23.406,21.612 ; 23.406,21.612 ccw(c22.793,21.612) 23.226,22.045 cw(c22.793,21.612) 23.406,21.612 ; 55.664,30.502 cw(c56.277,30.502) 55.844,30.935 ccw(c56.277,30.502) 55.664,30.502 ; 55.664,30.502 ccw(c55.051,30.502) 55.484,30.935 cw(c55.051,30.502) 55.664,30.502
U6C1: J10.1 U6.5 | length 28.6
  Top Layer w0.254: U6.5@67.361,18.685 70.126,18.685 72.428,16.383 v1(75.222,16.383) ; J10.1@88.069,8.631 J10.1@88.069,15.031
  Bottom Layer w0.254: v1(75.222,16.383) 75.603,16.002 86.311,16.002 87.281,15.031 J10.1@88.069,15.031
U6C2: J10.2 U6.7 | length 13.6
  Top Layer w0.254: U6.7@72.161,19.185 73.309,19.185 73.952,18.542 v1(73.952,17.78)
  Bottom Layer w0.254: v1(73.952,17.78) 73.952,15.24 74.511,14.681 J10.2@80.069,14.681 ; 73.952,17.167 cw(c74.565,17.167) 74.132,17.6 ccw(c74.565,17.167) 73.952,17.167 ; 73.952,17.167 ccw(c73.339,17.167) 73.772,17.6 cw(c73.339,17.167) 73.952,17.167
U6COM1: J9.1 U6.3 | length 30.9
  Top Layer w0.254: U6.3@67.361,19.685 68.237,19.685 ; v1(68.745,19.431) 68.491,19.431 68.237,19.685 ; J9.1@88.069,17.1 J9.1@88.069,23.5 ; 68.237,19.685 ccw(c68.447,19.895) 68.608,19.645 cw(c68.447,19.895) 68.237,19.685
  Bottom Layer w0.254: v1(68.745,19.431) 69.771,19.431 70.228,18.974 85.407,18.974 87.281,17.1 J9.1@88.069,17.1 ; 69.358,19.431 cw(c69.358,20.044) 68.925,19.611 ccw(c69.358,20.044) 69.358,19.431 ; 69.358,19.431 ccw(c69.358,18.818) 68.925,19.251 cw(c69.358,18.818) 69.358,19.431
U6COM2: J9.2 U6.9 | length 8.3
  Top Layer w0.254: U6.9@72.161,20.185 74.452,20.185 77.417,23.15 J9.2@79.281,23.15
U6IN1: U1.25 U6.4 | length 30.4
  Top Layer w0.254: U1.25@45.177,29.025 46.578,29.025 47.155,28.448 47.155,21.463 49.433,19.185 U6.4@67.361,19.185
U6IN2: U1.26 U6.8 | length 48.6
  Top Layer w0.254: U1.26@45.177,29.525 45.22,29.482 46.767,29.482 47.612,28.637 47.612,21.652 49.622,19.642 65.4,19.642 ; 64.911,19.768 cw(c65.203,19.263) v1@65.547,19.734 ; 65.248,19.963 cw(c65.454,19.607) v1(65.697,19.939) ; v1@65.446,19.976 cw(c65.035,20.036) 65.242,19.677 cw(c65.45,19.317) v1@65.603,19.703 ; v1(70.523,19.685) U6.8@72.161,19.685 ; 65.4,19.642 cw(c65.556,19.486) 65.621,19.697 ccw(c65.556,19.486) 65.4,19.642 ; 65.4,19.642 ccw(c65.244,19.798) 65.455,19.863 cw(c65.244,19.798) 65.4,19.642 ; 65.4,19.642 v1(65.697,19.939) ; v1(65.697,19.939) cw(c64.98,20.656) 64.98,19.642 ccw(c64.98,20.656) v1(65.697,19.939) ; 64.367,19.642 ccw(c64.367,21.269) 65.517,20.119 cw(c64.367,21.269) 64.367,19.642
  Bottom Layer w0.254: v1@65.89,20.104 ccw(c66.161,20.335) 66.34,20.027 ; 66.075,19.874 cw(c65.925,20.134) v1(65.697,19.939) ; v1(70.523,19.685) 70.066,20.142 65.9,20.142 v1(65.697,19.939) ; v1(65.697,19.939) cw(c66.187,19.449) 66.187,20.142 ccw(c66.187,19.449) v1(65.697,19.939) ; 70.089,20.119 cw(c69.656,19.685) 70.269,19.685 ccw(c69.656,19.685) 70.089,20.119 ; 70.089,20.119 ccw(c70.523,20.552) 70.523,19.939 cw(c70.523,20.552) 70.089,20.119 ; v1@65.877,19.759 cw(c66.8,18.836) 66.8,20.142 ccw(c66.8,18.836) v1@65.877,19.759
U7C1: J10.3 U7.5 | length 13.5
  Top Layer w0.254: U7.5@67.361,12.843 68.856,12.843 69.888,11.811 76.452,11.811 J10.3@79.281,8.981
U7C2: J10.4 U7.7 | length 9.6
  Top Layer w0.254: U7.7@72.161,13.343 72.169,13.335 v1(74.079,13.335)
  Bottom Layer w0.254: v1(74.079,13.335) 75.984,13.335 77.488,11.831 J10.4@79.252,11.831 ; 74.692,13.335 cw(c74.692,13.948) 74.259,13.515 ccw(c74.692,13.948) 74.692,13.335 ; 74.692,13.335 ccw(c74.692,12.722) 74.259,13.155 cw(c74.692,12.722) 74.692,13.335
U7COM1: J9.3 U7.3 | length 16.6
  Top Layer w0.254: U7.3@67.361,13.843 68.502,13.843 70.077,12.268 76.822,12.268 77.508,12.954 77.508,16.129 78.829,17.45 J9.3@79.281,17.45
U7COM2: J9.4 U7.9 | length 10.6
  Top Layer w0.254: U7.9@72.161,14.343 74.325,14.343 76.111,16.129 76.111,17.929 78.481,20.3 J9.4@79.269,20.3
U7IN1: U1.27 U7.4 | length 42.3
  Top Layer w0.254: U1.27@45.177,30.025 46.87,30.025 48.069,28.827 48.069,21.852 49.822,20.099 61.572,20.099 v1(61.826,20.353) ; v1(65.951,13.343) U7.4@67.361,13.343
  Bottom Layer w0.254: 61.783,19.937 cw(c62.092,20.115) v1(61.826,20.353) ; v1@61.821,20.099 cw(c61.817,19.829) 62.05,19.964 cw(c62.284,20.099) v1@62.048,20.23 ; 61.958,19.632 cw(c62.368,19.869) v1@62.015,20.184 ; v1(65.951,13.343) 65.951,14.107 62.08,17.979 62.08,20.099 v1(61.826,20.353) ; v1(61.826,20.353) cw(c61.212,19.74) 62.08,19.74 ccw(c61.212,19.74) v1(61.826,20.353) ; 65.951,13.956 cw(c65.338,13.956) 65.771,13.523 ccw(c65.338,13.956) 65.951,13.956 ; 65.951,13.956 ccw(c66.564,13.956) 66.131,13.523 cw(c66.564,13.956) 65.951,13.956 ; v1@61.646,20.173 cw(c60.599,19.127) 62.08,19.127 ccw(c60.599,19.127) v1@61.646,20.173
U7IN2: U1.28 U7.8 | length 47.7
  Top Layer w0.254: U1.28@45.177,30.525 45.22,30.482 47.059,30.482 48.526,29.016 48.526,22.041 50.011,20.556 60.599,20.556 ; v1(60.871,20.828) 60.599,20.556 ; v1(63.411,15.113) 64.046,15.113 64.808,15.875 70.066,15.875 70.853,15.088 70.853,14.224 71.234,13.843 U7.8@72.161,13.843 ; 60.599,20.556 cw(c60.715,20.44) 60.776,20.592 ccw(c60.715,20.44) 60.599,20.556 ; 60.599,20.556 ccw(c60.483,20.672) 60.635,20.733 cw(c60.483,20.672) 60.599,20.556 ; 64.024,15.113 cw(c64.024,15.726) 63.591,15.293 ccw(c64.024,15.726) 64.024,15.113 ; 64.024,15.113 ccw(c64.024,14.5) 63.591,14.933 cw(c64.024,14.5) 64.024,15.113
  Bottom Layer w0.254: v1(60.871,20.828) 60.871,17.653 v1(63.411,15.113) ; 60.871,20.215 cw(c61.484,20.215) 61.051,20.648 ccw(c61.484,20.215) 60.871,20.215 ; 60.871,20.215 ccw(c60.258,20.215) 60.691,20.648 cw(c60.258,20.215) 60.871,20.215 ; 62.977,15.547 cw(c62.544,15.113) 63.157,15.113 ccw(c62.544,15.113) 62.977,15.547 ; 62.977,15.547 ccw(c63.411,15.98) 63.411,15.367 cw(c63.411,15.98) 62.977,15.547
U8C1: J1.3 R10.2 U1.10 U8.3 | length 72.1
  Top Layer w0.254: U8.3@16.815,51.181 v1(15.659,51.181) 15.659,47.625 16.294,46.99 27.48,46.99 27.683,47.193 28.273,47.193 29.629,45.837 v1(29.629,45.72) ; v1(37.884,30.226) 37.683,30.025 U1.10@36.677,30.025 35.513,30.025 34.367,28.879 34.367,25.185 33.269,24.087 R10.2@32.954,24.087 ; 16.272,51.181 cw(c16.272,51.794) 15.839,51.361 ccw(c16.272,51.794) 16.272,51.181 ; 16.272,51.181 ccw(c16.272,50.568) 15.839,51.001 cw(c16.272,50.568) 16.272,51.181 ; R10.2@32.954,24.087 ccw(c32.954,24.848) 33.492,24.31 cw(c32.954,24.848) R10.2@32.954,24.087 ; R10.2@32.954,24.341 ccw(c32.954,25.716) 33.926,24.744 cw(c32.954,25.716) R10.2@32.954,24.341
  Bottom Layer w0.254: J1.3@11.523,53.376 13.337,53.376 15.532,51.181 v1(15.659,51.181) ccw(c15.113,50.978) 15.264,51.541 ; v1@29.718,45.958 ccw(c29.873,46.375) 30.096,45.99 ccw(c30.318,45.604) v1@29.879,45.678 ; v1@29.775,45.928 ccw(c30.125,46.422) 30.428,45.898 ; 30.084,45.699 cw(c29.873,46.065) v1(29.629,45.72) ; v1(37.884,30.226) 37.884,31.496 35.725,33.655 35.725,44.185 33.885,46.025 29.934,46.025 v1(29.629,45.72) ; v1(29.629,45.72) cw(c30.365,44.984) 30.365,46.025 ccw(c30.365,44.984) v1(29.629,45.72) ; 37.884,30.839 cw(c37.271,30.839) 37.704,30.406 ccw(c37.271,30.839) 37.884,30.839 ; 37.884,30.839 ccw(c38.497,30.839) 38.064,30.406 cw(c38.497,30.839) 37.884,30.839 ; 15.009,51.704 ccw(c15.659,52.355) 15.659,51.435 cw(c15.659,52.355) 15.009,51.704 ; 15.315,51.398 cw(c15.098,51.181) 15.405,51.181 ccw(c15.098,51.181) 15.315,51.398 ; v1@29.809,45.54 cw(c30.979,44.37) 30.979,46.025 ccw(c30.979,44.37) v1@29.809,45.54
U8C2: J1.4 U8.9 | length 13.7
  Top Layer w0.254: v1(20.104,51.689) 21.607,51.689 U8.9@21.615,51.681 ; 20.717,51.689 cw(c20.717,52.302) 20.284,51.869 ccw(c20.717,52.302) 20.717,51.689 ; 20.717,51.689 ccw(c20.717,51.076) 20.284,51.509 cw(c20.717,51.076) 20.717,51.689
  Bottom Layer w0.254: J1.4@12.323,50.526 12.379,50.47 18.885,50.47 v1(20.104,51.689) ; 19.67,51.255 cw(c20.104,50.822) 20.104,51.435 ccw(c20.104,50.822) 19.67,51.255 ; 19.67,51.255 ccw(c19.237,51.689) 19.85,51.689 cw(c19.237,51.689) 19.67,51.255
U8IN1: U1.45 U8.4 U8.8 | length 33.7
  Top Layer w0.254: U8.4@16.815,50.681 20.101,50.681 20.602,51.181 U8.8@21.615,51.181 22.898,51.181 23.109,51.392 31.45,51.392 39.677,43.165 U1.45@39.677,36.025
U9C1: J2.3 R11.2 U1.11 U9.3 | length 70
  Top Layer w0.254: v1(15.231,42.025) 15.52,42.025 15.635,41.91 ; v1(16.167,46.228) 16.421,46.482 v1(27.978,46.482) ; U9.3@16.307,41.91 15.635,41.91 ; R11.2@34.824,24.087 34.824,28.69 35.659,29.525 U1.11@36.677,29.525 37.569,29.525 ; v1(37.884,29.21) 37.569,29.525 ; 15.635,41.91 cw(c15.635,42.062) 15.484,42.048 ccw(c15.635,42.062) 15.635,41.91 ; 34.824,24.7 cw(c34.211,24.7) 34.644,24.267 ccw(c34.211,24.7) 34.824,24.7 ; 34.824,24.7 ccw(c35.437,24.7) 35.003,24.267 cw(c35.437,24.7) 34.824,24.7 ; 37.569,29.525 cw(c37.381,29.338) 37.638,29.273 ccw(c37.381,29.338) 37.569,29.525 ; 37.569,29.525 ccw(c37.756,29.713) 37.821,29.456 cw(c37.756,29.713) 37.569,29.525
  Bottom Layer w0.254: J2.3@11.523,44.164 12.311,44.164 14.565,41.91 ; 15.696,45.848 ccw(c15.503,46.568) v1(16.167,46.228) ; v1(27.978,46.482) 34.074,46.482 36.182,44.374 36.182,33.96 38.341,31.801 38.341,30.861 38.595,30.607 38.595,29.931 37.884,29.22 v1(37.884,29.21) ; 14.565,41.91 ccw(c14.565,42.442) 15.016,42.16 cw(c14.565,42.442) 14.565,41.91 ; 14.565,41.91 15.116,41.91 v1(15.231,42.025) 15.231,45.546 15.913,46.228 v1(16.167,46.228) ; 15.231,42.638 cw(c14.618,42.638) 15.051,42.205 ccw(c14.618,42.638) 15.231,42.638 ; 15.231,42.638 ccw(c15.844,42.638) 15.411,42.205 cw(c15.844,42.638) 15.231,42.638 ; v1(16.167,46.228) ccw(c16.167,45.615) 15.733,46.048 cw(c16.167,45.615) v1(16.167,46.228) ; 28.591,46.482 cw(c28.591,47.095) 28.158,46.662 ccw(c28.591,47.095) 28.591,46.482 ; 28.591,46.482 ccw(c28.591,45.869) 28.158,46.302 cw(c28.591,45.869) 28.591,46.482 ; 15.3,45.615 cw(c16.167,44.748) 16.167,45.974 ccw(c16.167,44.748) 15.3,45.615 ; v1@37.884,29.464 ccw(c37.884,30.052) 38.3,29.636 cw(c37.884,30.052) v1@37.884,29.464 ; v1@38.138,29.21 cw(c38.777,29.21) 38.325,29.662 ccw(c38.777,29.21) v1@38.138,29.21
U9C2: J2.4 U9.9 | length 11.2
  Top Layer w0.254: v1(19.596,42.418) 21.099,42.418 U9.9@21.107,42.41
  Bottom Layer w0.254: J2.4@12.323,41.314 14.06,41.314 ; 14.092,41.282 14.06,41.314 ; v1(19.596,42.418) 18.492,41.314 14.06,41.314 ; 19.162,41.984 cw(c19.596,41.551) 19.596,42.164 ccw(c19.596,41.551) 19.162,41.984 ; 19.162,41.984 ccw(c18.729,42.418) 19.342,42.418 cw(c18.729,42.418) 19.162,41.984
U9IN1: U1.46 U9.4 U9.8 | length 29
  Top Layer w0.254: U9.4@16.307,41.41 19.593,41.41 20.094,41.91 U9.8@21.107,41.91 22.273,41.91 22.484,42.121 38.689,42.121 39.177,41.633 U1.46@39.177,36.025
U10C1: J3.3 R12.2 U1.12 U10.3 | length 47.7
  Top Layer w0.254: U10.3@16.18,33.147 16.137,33.19 15.535,33.19 ; v1(32.55,26.67) 31.915,26.035 16.167,26.035 15.024,27.178 v1(15.024,33.528) 15.197,33.528 15.535,33.19 ; U1.12@36.677,29.025 v1(36.677,26.67) 36.677,24.105 R12.2@36.694,24.087 ; 15.024,32.915 cw(c15.637,32.915) 15.204,33.348 ccw(c15.637,32.915) 15.024,32.915 ; 15.024,32.915 ccw(c14.411,32.915) 14.844,33.348 cw(c14.411,32.915) 15.024,32.915 ; 15.535,33.19 ccw(c15.243,32.898) 15.107,33.288 cw(c15.243,32.898) 15.535,33.19
  Bottom Layer w0.254: J3.3@11.523,34.952 12.328,34.952 13.49,33.789 ; 13.482,33.781 13.735,33.528 v1(15.024,33.528) ; v1(32.55,26.67) v1(36.677,26.67) ; 14.411,33.528 cw(c14.411,32.915) 14.844,33.348 ccw(c14.411,32.915) 14.411,33.528 ; 14.411,33.528 ccw(c14.411,34.141) 14.844,33.708 cw(c14.411,34.141) 14.411,33.528 ; 33.163,26.67 cw(c33.163,27.283) 32.73,26.85 ccw(c33.163,27.283) 33.163,26.67 ; 33.163,26.67 ccw(c33.163,26.057) 32.73,26.49 cw(c33.163,26.057) 33.163,26.67 ; 36.063,26.67 cw(c36.063,26.057) 36.497,26.49 ccw(c36.063,26.057) 36.063,26.67 ; 36.063,26.67 ccw(c36.063,27.283) 36.497,26.85 cw(c36.063,27.283) 36.063,26.67
U10C2: J3.4 U10.9 | length 13.6
  Top Layer w0.254: v1(18.961,33.655) 20.972,33.655 U10.9@20.98,33.647 ; 19.574,33.655 cw(c19.574,34.268) 19.141,33.835 ccw(c19.574,34.268) 19.574,33.655 ; 19.574,33.655 ccw(c19.574,33.042) 19.141,33.475 cw(c19.574,33.042) 19.574,33.655
  Bottom Layer w0.254: J3.4@12.323,32.102 13.525,32.102 ; 13.111,32.102 17.408,32.102 v1(18.961,33.655) ; 18.527,33.221 cw(c18.961,32.788) 18.961,33.401 ccw(c18.961,32.788) 18.527,33.221 ; 18.527,33.221 ccw(c18.094,33.655) 18.707,33.655 cw(c18.094,33.655) 18.527,33.221
U10IN1: U1.21 U10.4 U10.8 | length 46.5
  Top Layer w0.254: U10.4@16.18,32.647 19.604,32.647 20.104,33.147 U10.8@20.98,33.147 22.136,33.147 22.771,32.512 22.898,32.512 v1(23.406,32.004) ; v1(41.948,25.019) 42.024,25.019 42.177,25.171 U1.21@42.177,27.525
  Bottom Layer w0.254: v1@23.184,31.881 cw(c22.948,31.75) 23.182,31.615 cw(c23.415,31.48) v1@23.41,31.75 ; v1@23.217,31.835 cw(c22.864,31.52) 23.273,31.283 ; 23.449,31.588 ccw(c23.14,31.766) v1(23.406,32.004) ; v1(23.406,32.004) ccw(c24.019,31.391) 23.152,31.391 cw(c24.019,31.391) v1(23.406,32.004) ; v1(23.406,32.004) 23.152,31.75 23.152,24.892 23.787,24.257 24.752,24.257 25.311,23.698 41.378,23.698 41.618,23.938 41.618,24.298 ; 41.618,24.298 ccw(c41.242,24.674) 41.72,24.907 cw(c41.242,24.674) 41.618,24.298 ; 41.618,24.298 41.948,24.628 ; 41.948,24.628 cw(c42.123,24.628) 42.052,24.787 ccw(c42.123,24.628) 41.948,24.628 ; 41.948,24.628 ccw(c41.773,24.628) 41.844,24.787 cw(c41.773,24.628) 41.948,24.628 ; 41.948,24.628 v1(41.948,25.019) ; v1(41.948,25.019) cw(c41.58,24.839) 41.87,24.549 ccw(c41.58,24.839) v1(41.948,25.019) ; 23.152,30.778 cw(c24.632,30.778) 23.586,31.824 ccw(c24.632,30.778) 23.152,30.778
U11C1: J4.3 R13.2 U1.13 U11.3 | length 39.3
  Top Layer w0.254: v1(15.659,23.876) 15.659,23.795 16.17,23.284 16.772,23.284 U11.3@16.815,23.241 18.199,23.241 18.58,23.622 18.58,24.13 19.977,25.527 29.934,25.527 v1(30.137,25.324) ; v1(38.138,25.781) v1@38.177,25.781 ; U1.13@38.177,27.525 v1@38.177,25.781 ; R13.2@38.564,24.087 38.177,24.475 v1@38.177,25.781
  Bottom Layer w0.254: J4.3@11.523,25.741 12.992,25.741 13.921,25.741 15.659,24.003 v1(15.659,23.876) cw(c15.862,24.422) 15.299,24.271 ; v1(30.137,25.324) 37.681,25.324 v1(38.138,25.781) ; 30.75,25.324 cw(c30.75,25.937) 30.317,25.504 ccw(c30.75,25.937) 30.75,25.324 ; 30.75,25.324 ccw(c30.75,24.711) 30.317,25.144 cw(c30.75,24.711) 30.75,25.324 ; 37.704,25.347 cw(c38.138,24.914) 38.138,25.527 ccw(c38.138,24.914) 37.704,25.347 ; 37.704,25.347 ccw(c37.271,25.781) 37.884,25.781 cw(c37.271,25.781) 37.704,25.347 ; 15.136,24.526 cw(c14.485,23.876) 15.405,23.876 ccw(c14.485,23.876) 15.136,24.526 ; 15.442,24.22 ccw(c15.659,24.437) 15.659,24.13 cw(c15.659,24.437) 15.442,24.22
U11C2: J4.4 U11.9 | length 12.1
  Top Layer w0.254: v1(19.723,23.749) 21.607,23.749 U11.9@21.615,23.741
  Bottom Layer w0.254: J4.4@12.323,22.891 13.627,22.891 ; 13.111,22.891 18.865,22.891 v1(19.723,23.749) ; 19.289,23.315 cw(c19.723,22.882) 19.723,23.495 ccw(c19.723,22.882) 19.289,23.315 ; 19.289,23.315 ccw(c18.856,23.749) 19.469,23.749 cw(c18.856,23.749) 19.289,23.315
U11IN1: U1.22 U11.4 U11.8 | length 33
  Top Layer w0.254: U11.4@16.815,22.741 19.858,22.741 20.358,23.241 U11.8@21.615,23.241 v1(24.676,23.241) ; v1(42.329,24.003) 42.677,24.351 ; U1.22@42.677,27.525 42.677,24.351 ; 42.677,24.351 cw(c42.43,24.597) 42.372,24.253 ccw(c42.43,24.597) 42.677,24.351 ; 42.677,24.351 ccw(c42.923,24.104) 42.579,24.046 cw(c42.923,24.104) 42.677,24.351
  Bottom Layer w0.254: v1(24.676,23.241) 41.567,23.241 v1(42.329,24.003) ; 25.289,23.241 cw(c25.289,23.854) 24.856,23.421 ccw(c25.289,23.854) 25.289,23.241 ; 25.289,23.241 ccw(c25.289,22.628) 24.856,23.061 cw(c25.289,22.628) 25.289,23.241
pads on no net: J1.2 J2.2 J3.2 J4.2 P0.4 P0.6@1.029,8.001 P0.6@1.029,15.265 P0.6@3.67,14.059 U1.1 U1.2 U1.3 U1.4 U1.29 U1.38 U2.7 U3.7 U4.7 U5.7 U12.4
copper on no net:
  other v2: 55.664,47.854

## Polygon pours and split planes (outlines as drawn)
GND on Top Overlay "Bottom Layer-No Net" (solid, remove dead copper): 0,66 91.6,66 91.6,0 0,0
GND on Bottom Layer "Bottom Layer-No Net" (solid, remove dead copper, pour order 5): 0,66 0,0 91.6,0 91.6,66